# Altium PCB 300W-boost_converter.PcbDoc
Units mm, origin at the board's own origin, x right, y up, seen from the top; angles counter-clockwise.
Board outline 140.59 x 97.66 mm, 2 copper layers (Top Layer, Bottom Layer); 54 components, 25 nets, 129 pads, 2 vias.
Unrouted connection lines stored in the file: 1.
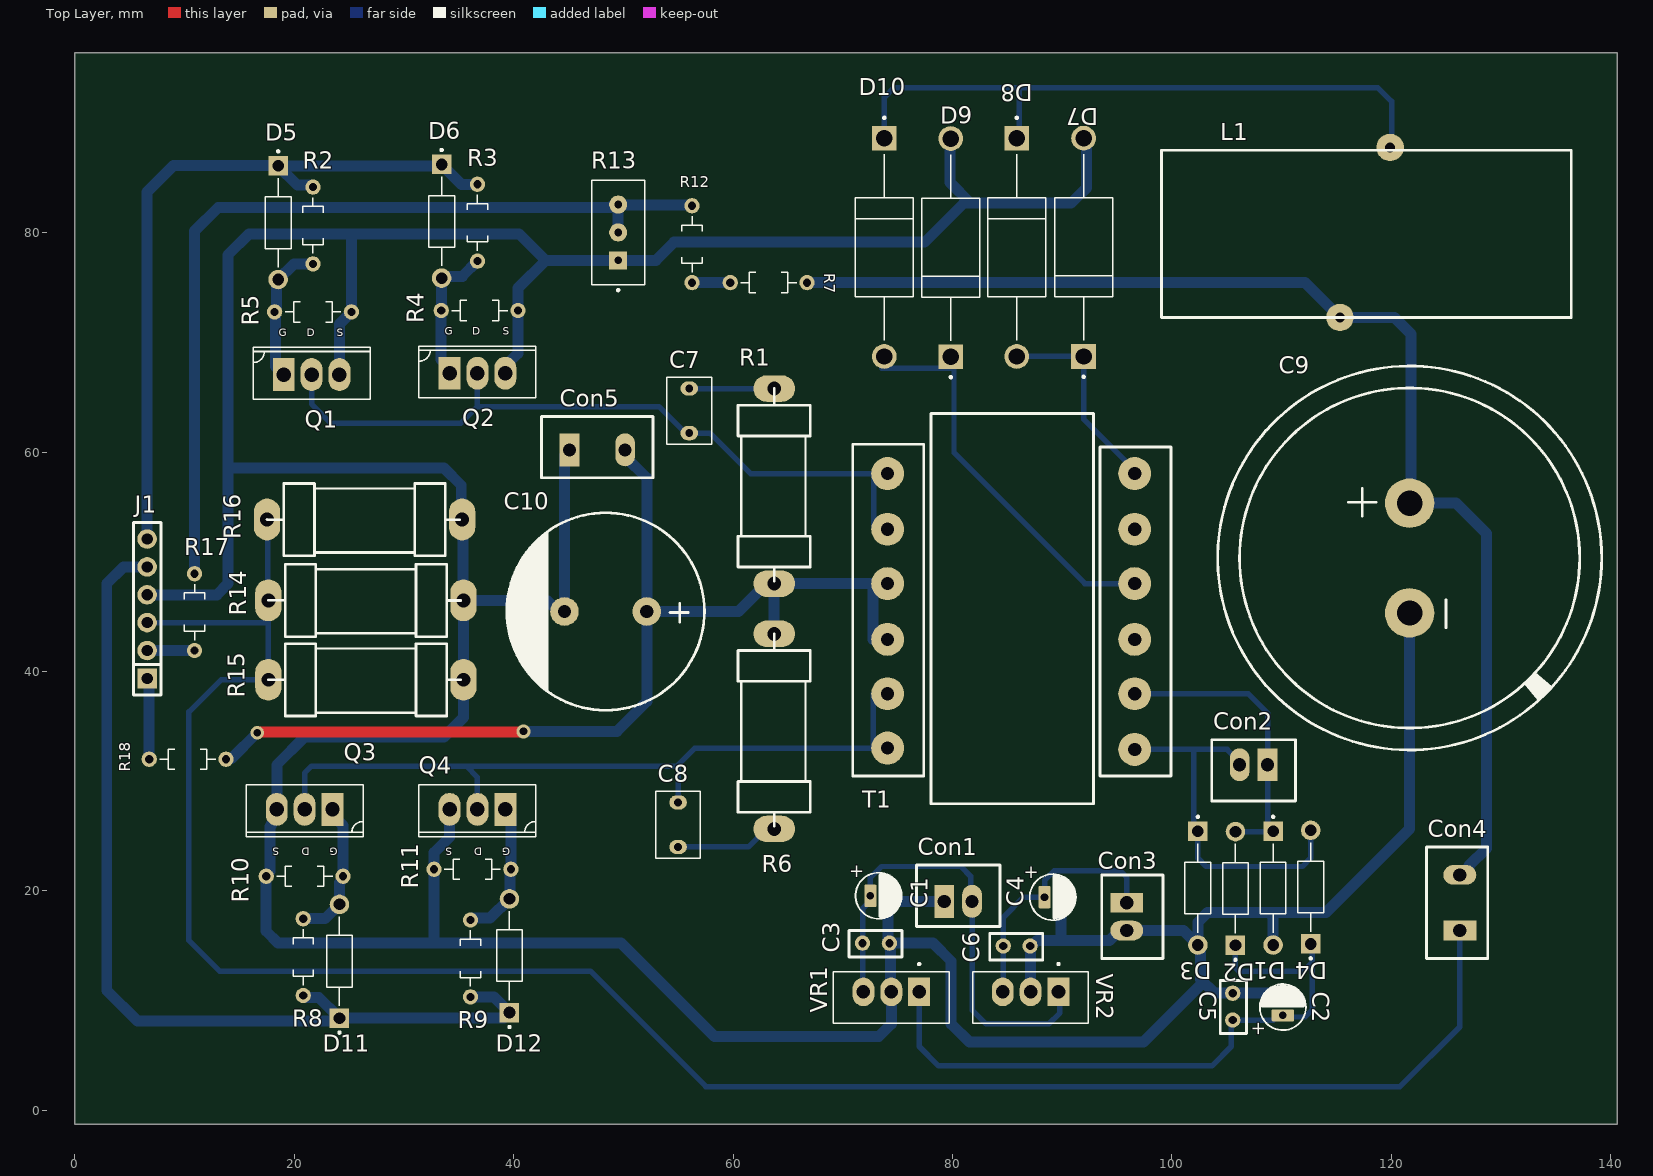
[diagram p0: Top Layer view]
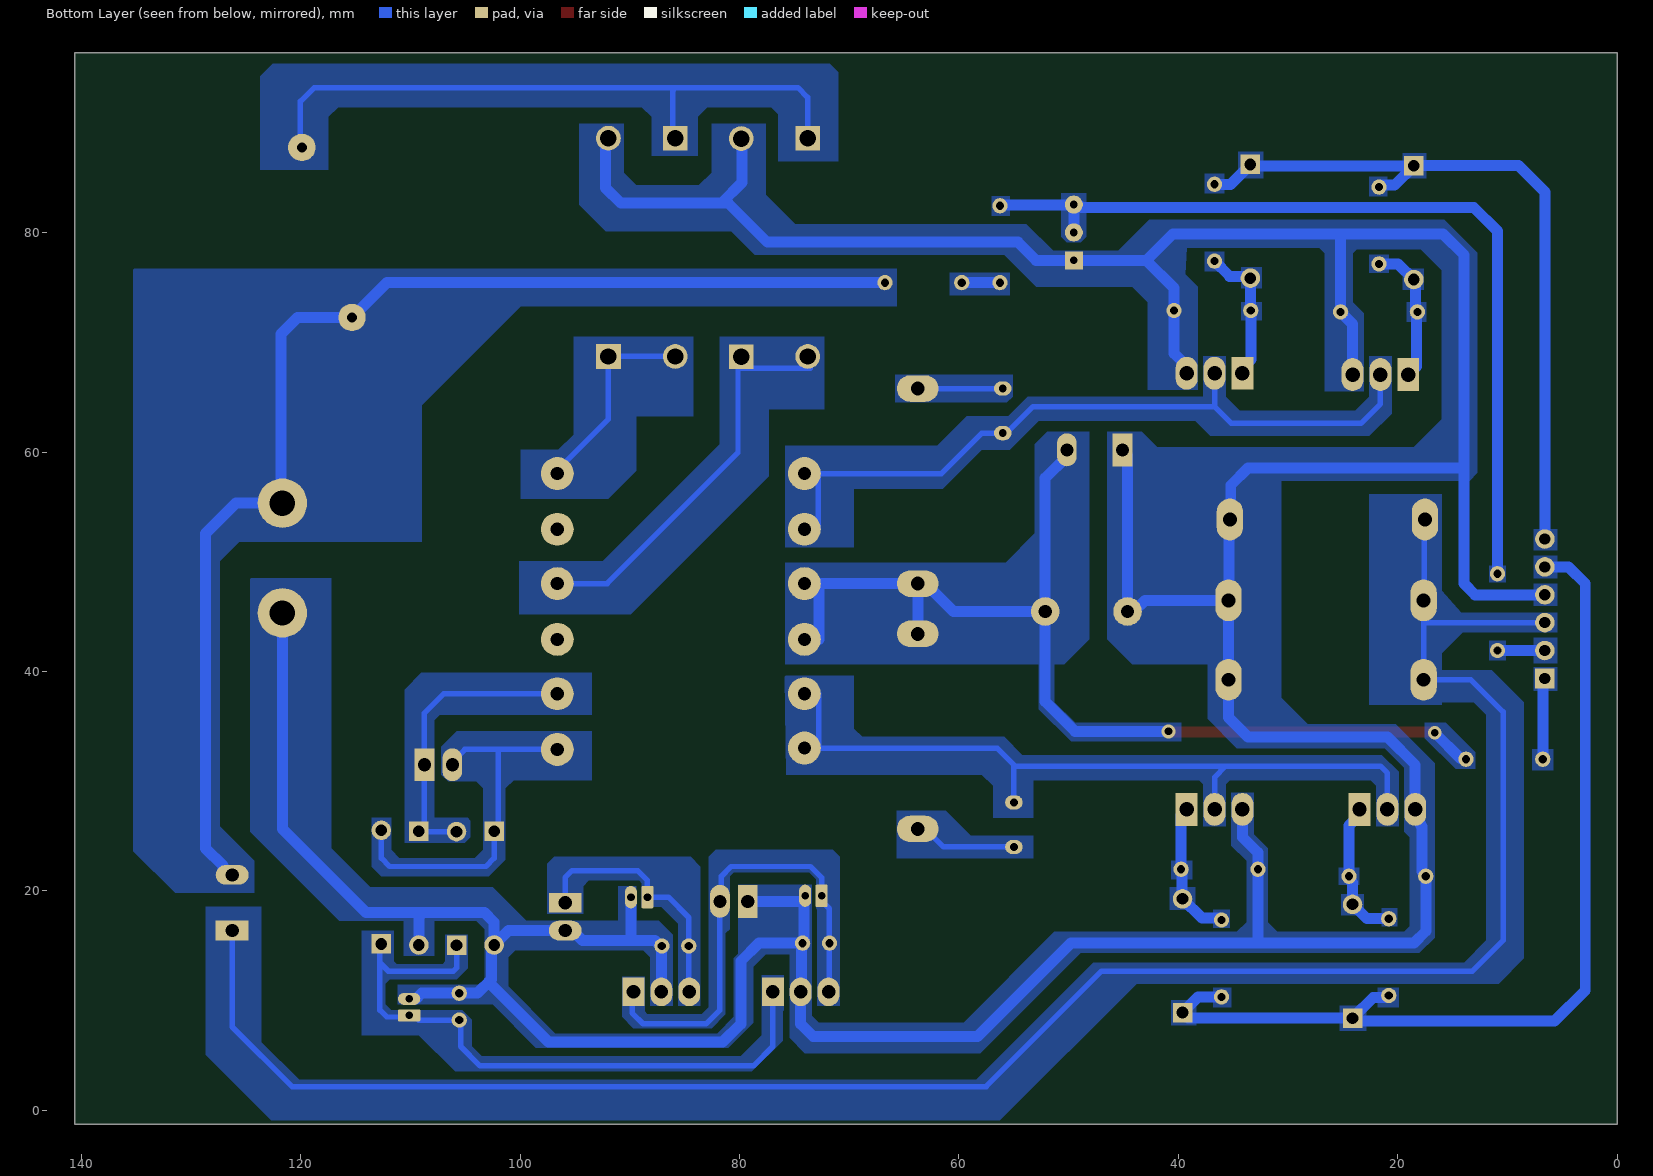
[diagram p1: Bottom Layer view, seen from below]
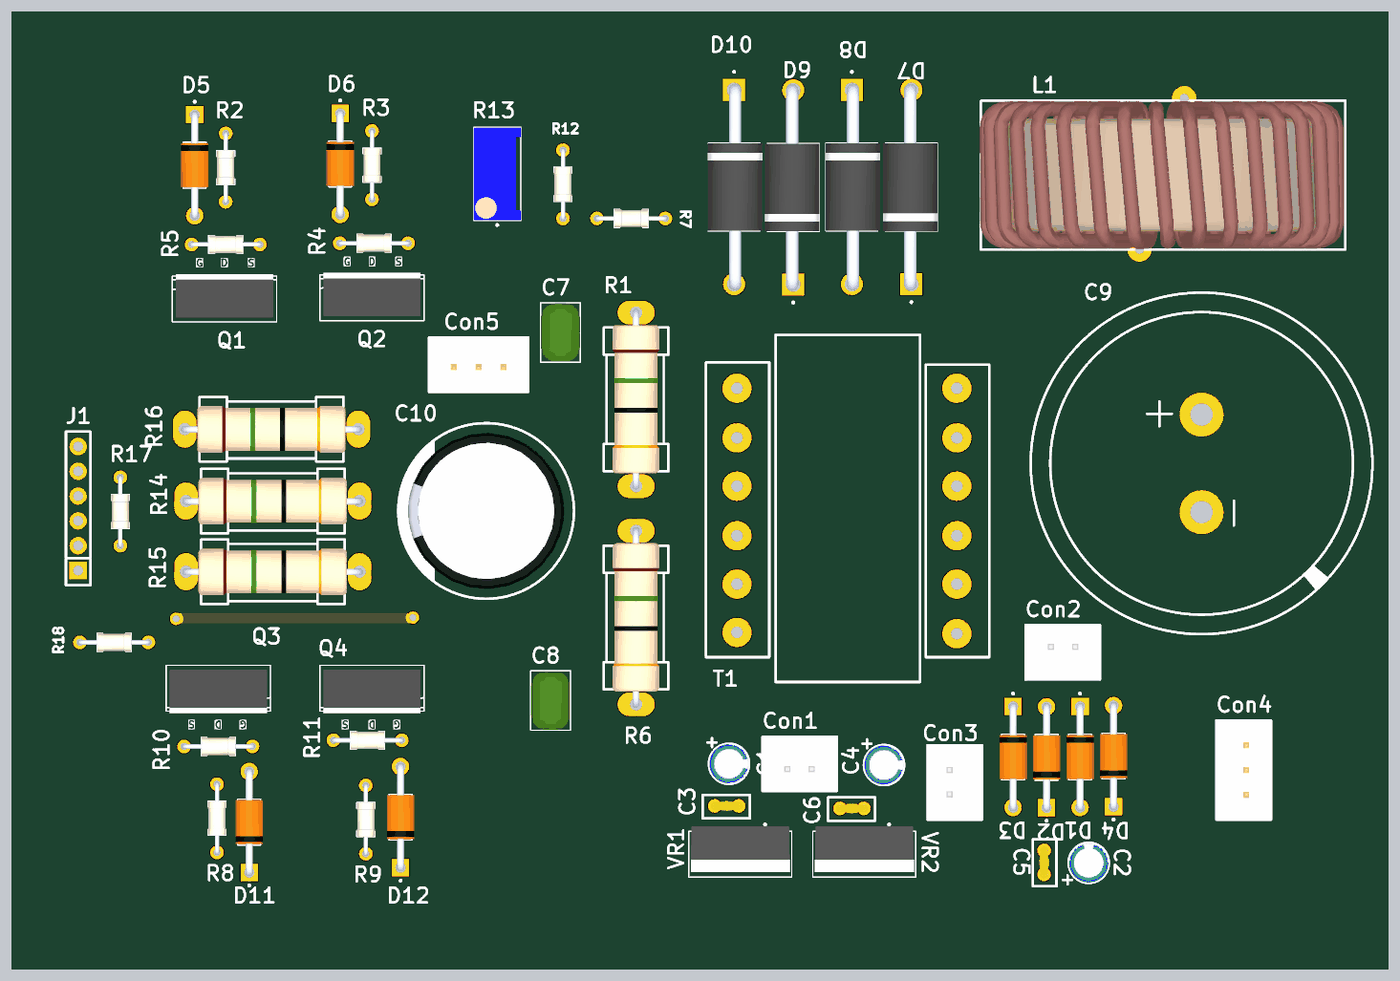
[diagram p2: 3D render of the assembled board from above, using the file's embedded part models]

## Layer stack, top to bottom
Top Solder: solder mask 0.0102, Solder Resist, Dk 3.5
Top Layer: signal copper 0.0356
Dielectric 1: dielectric 0.32, FR-4, Dk 4.8
Bottom Layer: signal copper 0.0356
Bottom Solder: solder mask 0.0102, Solder Resist, Dk 3.5

## Board outline
0,-1.27 140.589,-1.27 140.589,96.393 0,96.393

## Design rules (kind name [scope] priority, off if disabled: settings)
Clearance [All] p1: gap=0.254 ignorepadtopadclearanceinfootprint=FALSE except(0: Arc-Hole Track-Hole SMDPad-Hole THPad-Hole Via-Hole Fill-Hole Poly-Hole Region-Hole Text-Hole)
Height [InComponent('No Component')] p1: minheight=0 maxheight=25.4 prefheight=12.7
PolygonConnect [All] p1: connectstyle=Direct reliefconductorwidth=0.254 reliefentries=4 polygonreliefangle="90 Angle" airgapwidth=0.254
RoutingVias [All] p1: holewidth=0.711 width=1.27 viastyle="Through Hole" minholewidth=0.711 minwidth=1.27 maxholewidth=0.711 maxwidth=1.27
SolderMaskExpansion [All] p1: expansion=0.102 istentingtop=FALSE
Width [All] p1: maxlimit=1 minlimit=0.254 preferedwidth=0.5 minimp=50.000000 maximp=50.000000 favimp=50.000000
29 further rules are at their usual default settings.

## Classes and differential pairs
component class DC_power: C1 C2 C3 C4 C5 C6 Con1 Con2 Con3 D1 D2 D3 D4 VR1 VR2
component class "300W Converter_main_HV": C7 C8 C9 C10 Con4 Con5 D5 D6 D7 D8 D9 D10 D11 D12 J1 L1 Q1 Q2 Q3 Q4 R1 R2 R3 R4 R5 R6 R7 R8 R9 R10 R11 R12 R13 R14 R15 R16 R17 R18 R20 T1

## Components (designator, comment, footprint, x,y, rotation, side; value= is the part's Value field where it differs from the comment)
C1 "100UF25V" "CAP LS-1.5mm D4 H5" 72.517,19.558 r0 top
C2 "470UF25V" "CAP LS-1.5mm D4 H5" 110.109,8.66 r90 top
C3 "1UFCER" CAP-CER-2.54 73.025,15.24 r180 top
C4 "100UF25V" "CAP LS-1.5mm D4 H5" 88.392,19.431 r0 top
C5 "1UFCER" CAP-CER-2.54 105.537,9.455 r270 top
C6 "1UFCER" CAP-CER-2.54 85.852,14.986 r180 top
C7 "0.1uF" CAP-P_Pilm 56.007,63.754 r270 top
C8 "0.1uF" CAP-P_Pilm 54.991,26.035 r270 top
C9 "1000UF400V" CAP-TH_BD35.0-P10.00-D2.3-FD 121.666,50.339 r270 top
C10 "4700UF 35V" CAP-TH_BD18.0-P7.50-D1.2-FD 48.387,45.466 r180 top
Con1 "2pos" 2POS 79.248,19.05 r0 top
Con2 "2pos" 2POS 108.712,31.496 r180 top
Con3 "2pos" 2POS 95.885,18.923 r270 top
Con4 "2pos-3" "2POS - 3" 126.238,18.923 r90 top
Con5 "2pos" "2POS - 3" 47.625,60.198 r0 top
D1 "FR107" DIOAD1036W78L470D235 109.22,20.251 r270 top
D2 "FR107" DIOAD1036W78L470D235 105.791,20.22 r90 top
D3 "FR107" DIOAD1036W78L470D235 102.362,20.251 r270 top
D4 "FR107" DIOAD1036W78L470D235 112.649,20.347 r90 top
D5 "FR107" DIOAD1036W78L470D235 18.542,80.899 r270 top
D6 "FR107" DIOAD1036W78L470D235 33.441,81.026 r270 top
D7 "FR307" DO-27_BD5.3-L8.4-P12.40-D1.3-RD 92.007,78.266 r90 top
D8 "FR307" DO-27_BD5.3-L8.4-P12.40-D1.3-RD 85.793,79.048 r270 top
D9 "FR307" DO-27_BD5.3-L8.4-P12.40-D1.3-RD 79.906,78.231 r90 top
D10 "FR307" DO-27_BD5.3-L8.4-P12.40-D1.3-RD 73.728,79.048 r270 top
D11 "FR107" DIOAD1036W78L470D235 24.13,13.589 r90 top
D12 "FR107" DIOAD1036W78L470D235 39.624,14.097 r90 top
J1 "HDR6Pin" "HDR-TH_6P-P2.54-V-F - duplicate" 6.604,45.72 r90 top
L1 "Troidal core  220uH" "TOROIDAL CORE INDUCTOR" 117.602,79.883 r180 top
Q1 "IRF3205" TO-220 21.59,67.056 r0 top
Q2 "IRF3205" TO-220 36.703,67.183 r0 top
Q3 "IRF3205" TO-220 20.955,27.432 r180 top
Q4 "IRF3205" TO-220 36.703,27.432 r180 top
R1 "RES-0.5W-27R" "RES_TH 3W" 63.754,57.912 r90 top
R2 "10R" RES-TH-7mm 21.717,80.645 r270 top
R3 "10R" RES-TH-7mm 36.703,80.899 r270 top
R4 "10K" RES-TH-7mm 36.901,72.898 r0 top
R5 "10K" RES-TH-7mm 21.717,72.771 r0 top
R6 "RES-0.5W-27R" "RES_TH 3W" 63.754,35.56 r90 top
R7 "470K" RES-TH-7mm 63.246,75.438 r0 top
R8 "10R" RES-TH-7mm 20.828,13.97 r90 top
R9 "10R" RES-TH-7mm 36.068,13.843 r90 top
R10 "10K" RES-TH-7mm 20.955,21.336 r180 top
R11 "10K" RES-TH-7mm 36.251,21.971 r180 top
R12 "2.2K" RES-TH-7mm 56.261,78.938 r270 top
R13 "10K" TRIM_3296W-1-250 49.53,80.01 r90 top
R14 "RES-2W-1R" "RES_TH 3W" 25.527,46.482 r180 top
R15 "RES-2W-1R" "RES_TH 3W" 25.527,39.243 r180 top
R16 "RES-2W-1R" "RES_TH 3W" 25.4,53.848 r180 top
R17 "0R" RES-TH-7mm 10.922,45.41 r270 top
R18 "0R" RES-TH-7mm 10.287,32.004 r0 top
T1 "current transformer" EE35-FP16 85.344,45.466 r0 top
VR1 "LM7812CT" TO254P1054X470X1955-3 74.422,10.795 r180 top
VR2 "LM7805CT" TO254P1054X470X1955-3 87.122,10.795 r180 top

## Footprints (in the part's own frame and the unit in brackets; to place one, negate y for a bottom-side part, rotate by r counter-clockwise, add the part's x,y. Pads: shape width x height; smd on the part's side, far side on the other; paste and mask are expansions set on the pad)
2POS [mm]
  rect 1.8x3 hole 1.2: 1(0,0)
  oval 1.8x3 hole 1.2: 2(2.54,0)
  silkscreen extent -2.54,-2.29 5.08,3.3, body extent -2.47,-2.32 4.96,3.41, height 6.69
"2POS - 3" [mm]
  rect 1.8x3 hole 1.2: 1(-2.54,0)
  oval 1.8x3 hole 1.2: 2(2.54,0)
  silkscreen extent -5.08,-2.54 5.08,3.05, body extent -5.04,-2.54 5.04,3.16, height 7.01
"CAP LS-1.5mm D4 H5" [mm]
  rrect20% 1.1x2.032 hole 0.7: 1(0,0)
  oval 1.1x2.032 hole 0.7: 2(1.5,0)
  silkscreen extent -1.35,-2.1 2.85,2.1, body extent -1.25,-2 2.74,2, height 5
CAP-CER-2.54 [mm]
  round 1.397 hole 0.75: 1(-1.225,0) 2(1.225,0)
  silkscreen extent -2.37,-1.14 2.46,1.27, body extent -1.62,-0.5 1.62,0.5, height 4.99
CAP-P_Pilm [mm]
  oval 1.3x1.6 hole 0.71: 1(-2.032,0) 2(2.032,0)
  silkscreen extent -3.05,-2.03 3.05,2.03, body extent -3,-2 3,2, height 12.5
CAP-TH_BD18.0-P7.50-D1.2-FD [mm]
  round 2.6 hole 1.2 paste+0 mask+0.051: 1(-3.75,0.001) 2(3.75,0.001)
  silkscreen extent -9,-9 9,9, body extent -8,-8 8,8, height 35
CAP-TH_BD35.0-P10.00-D2.3-FD [mm]
  round 4.5 hole 2.3 paste+0 mask+0.051: 1(-5,0) 2(5,0)
  silkscreen extent -17.5,-17.5 17.5,17.5, body extent -15,-15 15,15, height 34.94
DIOAD1036W78L470D235 [mm]
  rect 1.778x1.778 hole 1.06: 1(-5.18,0)
  round 1.778 hole 1.06: 2(5.18,0)
  silkscreen extent -6.6,-1.17 4.07,1.17, body extent -5.55,-1.4 5.55,1.4, height 2.8
DO-27_BD5.3-L8.4-P12.40-D1.3-RD [mm]
  round 2.25 hole 1.5 mask+0.102: A(10.341,0.059)
  rect 2.25x2.25 hole 1.5 mask+0.102: C(-9.559,0.059)
  silkscreen extent -11.51,-2.59 8.86,2.71, body extent -10.19,-2.62 10.96,2.96, height 5.6
EE35-FP16 [mm]
  round 3 hole 1.2 paste+0.102 mask+0.102: 1(-11.26,7.493) 1(-11.26,12.573) 2(-11.26,-2.54) 2(-11.26,2.54) 3(-11.26,-12.446) 3(-11.26,-7.493) 4(11.26,-12.573) 5(11.26,-7.493) 6(11.26,2.54) 7(11.26,12.573) ""(11.26,-2.54) ""(11.26,7.493)
  silkscreen extent -14.43,-17.53 14.57,18.03
"HDR-TH_6P-P2.54-V-F - duplicate" [mil]
  rect 70.87x70.87 hole 40.16 paste+0 mask+2: 1(-250,0)
  round 70 hole 40.16 paste+0 mask+2: 2(-150,0) 3(-50,0) 4(50,0) 5(150,0) 6(250,0)
  silkscreen extent -310,-49 310,49
RES-TH-7mm [mm]
  round 1.397 hole 0.75: 1(-3.5,0) 2(3.5,0)
  silkscreen extent -2.55,-0.92 2.55,0.92, body extent -3.72,-0.92 3.72,0.92, height 1.84
"RES_TH 3W" [mil] "Res_TH 3W"
  oval 95x150 hole 50: 1(-390,0) 2(310,0)
  silkscreen extent -380,-130 310,130, body extent -403,-93 325,95, height 225
TO254P1054X470X1955-3 [mm]
  rect 2x2.6 hole 1.24: 1(-2.54,0)
  oval 2x2.6 hole 1.24: 2(0,0) 3(2.54,0)
  silkscreen extent -5.27,-2.64 5.27,2.86, body extent -5.08,-2.35 5.08,2.35, height 15.49
TO-220 [mm] "TO-220"
  rect 2x3 hole 1.32: 1(-2.54,0)
  oval 2x3 hole 1.32: 2(0,0) 3(2.54,0)
  silkscreen extent -5.34,-2.22 5.34,2.47, body extent -4.98,-1.76 4.98,2.69, height 19.68
"TOROIDAL CORE INDUCTOR" [mil]
  round 98.42 hole 36 paste+0 mask+2: 1(90,300) 2(-90,-310)
  silkscreen extent -740,-300 730,300, body extent -735,-297 735,297, height 1837
TRIM_3296W-1-250 [mil]
  rect 65x65 hole 27.95: 1(-100,0)
  round 65 hole 27.95: 2(0,0) 3(100,0)
  silkscreen extent -211,-95 188,95, body extent -188,-95 188,95, height 455

## Part data
C1 C4: "CAP TH AL: 100U 25V", LCSC Part #=C43351, Unit Price=0.0057
C2: "CAP TH AL: 470U 25V", LCSC Part #=C43351, Unit Price=0.0057
C3 C5 C6: "CAP: CER 1UF 50V", LCSC Part #=C1848, Unit Price=0.0104
C7 C8: library part 0.1uF_film, "Cap Ceramic 0.1uF 100V X7R 10% Radial 2.54mm 125Â°C T/R", Package=None, Check_prices=https://www.snapeda.com/parts/SR201C104KARTR1/Kyocera/view-part/?ref=eda, MF="KYOCERA AVX", MP=SR201C104KARTR1, SnapEDA_Link=https://www.snapeda.com/parts/SR201C104KARTR1/Kyocera/view-part/?ref=snap
C9: "CAP TH AL: 1000U 400V", LCSC Part #=C43351, Unit Price=0.0057
C10: "CAP TH AL: 4700UF 35V", LCSC Part #=C43351, Unit Price=0.0057
Con1 Con2 Con3 Con4 Con5: "P2.54mm"
D1 D2 D3 D4 D5 D6 D11 D12: "DIODE: GEN 1A 1.0V@1A 1kV DO-41 TH", LCSC Part #=C36138, Unit Price=0.0313
D7 D8 D9 D10: "DIODE: 500ns, 3A, 1000V, Fast Recovery RectifierDO-201AD TH", LCSC Part #=C36138, Unit Price=0.0313
J1: library part HDR6Pin_1, "HEADER: 1*6P FEMale"
L1: library part Inductor, "Troidal core  inductor: 220uH"
Q1 Q2 Q3 Q4: "MOSFET: N-CH 55V 110A TO-220", LCSC Part #=C274639, Unit Price=0.2595
R1 R6: "RES: 27 OHM 1% 0.5W TH"
R2 R3 R8 R9: "RES TH: 10R"
R4 R5 R10 R11: "RES TH: 10K"
R7: "RES TH: 470K"
R12: "RES TH: 2.2K"
R13: library part "10K POT", "RES TH: 10K POT"
R14 R15 R16: "RES: 1 OHM 1% 2W TH"
R17 R18: "RES TH: JUMPER"
T1: library part "EE42 transformer", "ferrite core transformer EE42"
VR1: "1.5-A, 12-V, linear voltage regulator", Package="TO-220-3 Texas Instruments", Check_prices=https://www.snapeda.com/parts/LM7812CT/NOPB/Texas+Instruments/view-part/?ref=eda, MF="Texas Instruments", MP=LM7812CT/NOPB, SnapEDA_Link=https://www.snapeda.com/parts/LM7812CT/NOPB/Texas+Instruments/view-part/?ref=snap
VR2: "1.5-A,  5-V, linear voltage regulator", Package="TO-220-3 Texas Instruments", Check_prices=https://www.snapeda.com/parts/LM7812CT/NOPB/Texas+Instruments/view-part/?ref=eda, MF="Texas Instruments", MP=LM7812CT/NOPB, SnapEDA_Link=https://www.snapeda.com/parts/LM7812CT/NOPB/Texas+Instruments/view-part/?ref=snap

## Via types
v1: diameter 1.27, hole 0.711, Top Layer to Bottom Layer, 2 vias

## Nets (pads, with @x,y where several pads share a name; then routed paths per layer and width w, separated by ;. In a path a pad name is that pad's centre, name@x,y a point inside that pad or via, vN(x,y) a via of type N, cw(c..) or ccw(c..) an arc to the next point about the centre after c; other vN are vias at no path point)
400V: C9.1 Con4.2 L1.1 R7.2 | length 112.8
  Bottom Layer w1: R7.2 112.141,75.438 L1.1 120.269,72.263 121.793,70.739 121.793,55.466 C9.1 125.89,55.339 128.651,52.578 128.651,23.876 127.087,22.312 127.087,22.064 126.486,21.463 Con4.2
+5: C4.1 C6.2 Con3.1 VR2.3 | length 23.3
  Bottom Layer w0.5: VR2.3 84.604,10.817 84.604,14.964 C6.2 84.627,17.571 86.487,19.431 C4.1 88.392,20.955 89.281,21.844 95.25,21.844 95.885,21.209 Con3.1
+12: C1.1 C3.2 Con1.2 VR1.3 VR2.1 | length 43.8
  Bottom Layer w0.5: VR1.3 71.841,10.836 71.841,15.199 C3.2 71.8,18.375 72.517,19.092 72.517,21.209 73.533,22.225 80.772,22.225 81.661,21.336 81.661,19.177 Con1.2 81.788,9.144 83.058,7.874 88.773,7.874 89.789,8.89 89.789,10.668 VR2.1
+18VAC: Con2.1 D1.1 D2.2 T1.5 | length 26.1
  Bottom Layer w0.5: T1.5@97.79,37.973 106.934,37.973 108.712,36.195 Con2.1 108.712,25.939 D1.1 109.189,25.4 D2.2
-18VAC: Con2.2 D3.1 D4.2 T1.4 | length 32.6
  Bottom Layer w0.5: T1.4@97.79,32.893 101.981,32.893 ; Con2.2 106.172,31.744 105.023,32.893 101.981,32.893 ; D4.2 112.649,22.987 111.887,22.225 103.124,22.225 102.362,22.987 D3.1 101.981,25.812 101.981,32.893
D1: C7.2 Q1.2 Q2.2 T1.1 | length 65.9
  Bottom Layer w0.5: Q1.2 21.59,64.389 23.368,62.611 35.179,62.611 36.703,64.135 ; Q2.2 36.703,64.135 ; T1.1@72.898,52.959 72.834,53.023 72.834,57.975 72.771,58.039 61.595,58.039 57.912,61.722 C7.2 55.655,61.722 53.242,64.135 36.703,64.135
D2: C8.1 Q3.2 Q4.2 T1.3 | length 68.8
  Bottom Layer w0.5: Q3.2 20.955,30.734 21.59,31.369 35.687,31.369 ; Q4.2 36.703,30.353 35.687,31.369 ; C8.1 54.991,31.496 ; T1.3@72.771,37.973 72.771,33.02 56.515,33.02 54.991,31.496 ; 35.687,31.369 54.864,31.369 54.991,31.496
GND: C1.2 C2.2 C3.1 C4.2 C5.1 C6.1 C9.2 C10.2 Con1.1 Con3.2 Con5.1 D1.2 D3.2 D7.A D9.A J1.4 Q1.3 Q2.3 Q3.3 Q4.3 R4.2 R5.2 R10.2 R11.2 R13.1 R14.1 R15.1 R16.1 VR1.2 VR2.2 | length 470.8
  Bottom Layer w1: J1.4 12.954,46.99 13.97,48.006 13.97,58.547 ; Q1.3 24.13,71.684 R5.2 25.217,79.573 25.527,79.883 ; Q4.3 34.163,24.892 32.751,23.48 R11.2 32.751,15.24 ; Q2.3 39.243,67.842 40.401,69 R4.2 40.401,74.945 42.926,77.47 ; Con5.1 44.637,59.75 C10.2 44.069,45.465 43.052,46.482 R14.1 ; C1.2 74.017,19.327 C1.2@74.132,19.212 ; Con1.1 74.294,19.05 C1.2@74.132,19.212 ; D9.A@79.756,87.79 79.756,84.582 81.661,82.677 ; VR2.2 87.099,10.818 87.099,14.964 C6.1 87.184,14.986 87.692,15.494 90.17,15.494 ; 89.892,15.594 C4.2 ; 90.27,15.494 94.299,15.494 94.975,16.17 95.672,16.17 Con3.2 101.05,16.383 D3.2 ; D7.A@92.202,88.449 92.202,84.074 90.805,82.677 81.661,82.677 ; 102.87,11.684 97.409,6.223 81.534,6.223 79.883,7.874 79.883,13.589 78.232,15.24 C3.1 ; D1.2 109.22,17.653 108.839,18.034 ; C2.2 109.481,10.16 108.961,10.68 C5.1 103.874,10.68 102.607,11.947 102.607,14.826 D3.2 ; C9.2 121.666,25.654 114.046,18.034 108.839,18.034 ; 13.97,58.547 33.655,58.547 35.23,56.972 35.23,53.924 R16.1 35.369,53.785 35.369,46.545 R14.1 ; 13.97,58.547 13.97,77.978 15.875,79.883 25.527,79.883 ; 25.527,79.883 40.513,79.883 42.926,77.47 ; 32.751,15.24 18.542,15.24 17.455,16.327 R10.2 17.455,21.443 17.78,21.768 17.78,25.891 17.915,26.026 17.915,26.161 18.415,26.661 Q3.3 18.415,31.496 20.955,34.036 33.655,34.036 35.433,35.814 R15.1 R14.1 ; 32.751,15.24 49.784,15.24 58.293,6.731 73.279,6.731 74.422,7.874 VR1.2 74.336,10.881 74.336,15.154 C3.1 ; 42.926,77.47 R13.1 52.959,77.47 54.61,79.121 77.47,79.121 81.026,82.677 81.661,82.677 ; C1.2@74.132,19.212 74.132,15.358 C3.1 ; D3.2 102.362,17.145 103.251,18.034 108.839,18.034
I_SENSE: Con4.1 J1.3 R14.2 R15.2 R16.2 | length 187.4
  Bottom Layer w0.5: J1.3 17.653,44.45 ; R16.2 17.59,53.785 17.59,46.545 R14.2 17.653,44.45 ; Con4.1 126.238,7.62 120.777,2.159 57.531,2.159 46.99,12.7 13.208,12.7 10.414,15.494 10.414,36.322 13.335,39.243 R15.2 17.653,44.45
NetC2_1: C2.1 C5.2 D2.1 D4.1 VR1.1 | length 60.9
  Bottom Layer w0.5: VR1.1 76.962,5.842 78.74,4.064 103.632,4.064 105.41,5.842 105.41,8.103 C5.2 109.213,8.23 109.643,8.66 C2.1 110.26,8.509 112.141,8.509 112.776,9.144 112.776,13.462 ; D2.1 105.791,12.993 106.084,12.7 112.014,12.7 112.776,13.462 ; D4.1@112.776,15.521 112.776,13.462
NetC7_1: C7.1 R1.2 | length 7.7
  Bottom Layer w0.5: C7.1 R1.2
NetC8_2: C8.2 R6.1 | length 9.4
  Bottom Layer w0.5: C8.2 61.404,24.003 63.055,25.654 R6.1
NetD5_2: D5.2 Q1.1 R2.2 R5.1 | length 12.9
  Bottom Layer w1: Q1.1 18.3,67.806 18.3,72.688 R5.1 18.38,72.934 18.38,75.557 D5.2 19.968,77.145 R2.2
NetD6_2: D6.2 Q2.1 R3.2 R4.1 | length 12.9
  Bottom Layer w1: Q2.1 34.163,67.683 33.401,68.445 R4.1 33.421,72.918 33.421,75.826 D6.2 33.613,76.018 35.322,76.018 R3.2
NetD7_C: D7.C D8.A T1.7 | length 19
  Bottom Layer w0.5: D8.A@86.612,68.707 D7.C 91.948,62.992 96.318,58.622 96.404,58.622 97.114,57.912 T1.7@97.79,57.912
NetD8_C: D8.C D10.C L1.2 | length 59.9
  Bottom Layer w0.5: D10.C 73.787,92.329 74.676,93.218 85.813,93.218 ; D8.C 86.106,88.861 86.106,92.925 85.813,93.218 ; L1.2 120.015,87.884 120.015,91.948 118.745,93.218 85.813,93.218
NetD9_C: D9.C D10.A T1.6 | length 36.9
  Bottom Layer w0.5: D10.A@73.556,67.621 79.94,67.621 80.01,67.691 80.137,67.564 80.137,59.944 92.075,48.006 T1.6@97.79,48.006
NetD11_2: D11.2 Q3.1 R8.2 R10.1 | length 13
  Bottom Layer w1: R8.2 22.831,17.47 D11.2 24.13,20.768 24.455,21.093 R10.1 24.455,25.972 23.495,26.932 Q3.1
NetD12_2: D12.2 Q4.1 R9.2 R11.1 | length 12.8
  Bottom Layer w1: R9.2 36.24,17.515 37.862,17.515 D12.2 39.688,19.34 39.688,21.907 R11.1 39.751,26.924 Q4.1
NetJ1_1: J1.1 R18.1 | length 7.4
  Bottom Layer w1: J1.1 6.787,39.187 R18.1
NetR7_1: R7.1 R12.2 | length 3.5
  Bottom Layer w1: R12.2 R7.1
PULSE_A_G: D5.1 D6.1 J1.6 R2.1 R3.1 | length 66.8
  Bottom Layer w1: J1.6 6.604,83.693 9.017,86.106 18.515,86.106 D5.1 ; R2.1 21.545,84.317 20.304,84.317 D5.1 ; D6.1@32.806,86.079 D5.1 ; D6.1 35.248,84.399 R3.1
PULSE_B_G: D11.1 D12.1 J1.5 R8.1 R9.1 | length 87.7
  Bottom Layer w1: J1.5 4.445,49.53 2.921,48.006 2.921,10.922 5.715,8.128 23.849,8.128 D11.1 39.116,8.409 D12.1 38.198,10.343 R9.1 ; R8.1 21,10.298 22.241,10.298 D11.1@24.03,8.509
V_FB: J1.2 R12.1 R13.2 R13.3 R17.1 R17.2 | length 84.5
  Bottom Layer w1: J1.2 R17.2 ; R17.1 10.922,80.137 13.081,82.296 48.816,82.296 48.945,82.425 49.405,82.425 R13.3 ; R13.2 R13.3 ; R12.1 56.205,82.494 49.586,82.494 R13.3
VBATT: C10.1 Con5.2 R1.1 R6.2 R18.2 T1.2 | length 95.6
  Top Layer w0.5: v1(16.637,34.417) v1@16.7,34.48 ; v1@40.831,34.48 v1(40.894,34.544)
  Top Layer w1: v1@16.7,34.48 v1@40.831,34.48
  Bottom Layer w1: R18.2 13.863,32.08 14.3,32.08 v1(16.637,34.417) ; v1(40.894,34.544) 49.403,34.544 52.137,37.278 C10.1 ; Con5.2 50.165,59.598 52.137,57.626 C10.1 ; R6.2 R1.1 ; T1.2@72.771,42.926 72.771,48.006 R1.1 ; C10.1 60.515,45.465 63.055,48.006 R1.1
pads on no net: T1.

## Polygon pours and split planes (outlines as drawn)
GND on Bottom Layer "GND_L02_P005" (solid, pour order 5): 12.764,58.102 13.462,57.404 34.544,57.404 34.544,60.452 18.542,60.452 16.002,62.992 16.002,76.581 17.907,78.486 23.749,78.486 24.13,78.105 24.13,73.66 23.114,72.644 23.114,65.532 26.67,65.532 26.67,78.105 27.178,78.613 39.255,78.613 39.37,76.2 38.227,75.057 38.227,65.659 42.799,65.659 42.799,73.66 44.196,75.057 51.562,75.057 51.562,78.359 45.466,78.359 42.672,81.153 15.748,81.153 12.764,78.169
D2 on Bottom Layer "D2_L02_P008" (solid, pour order 8): 19.939,25.908 21.971,25.908 21.971,29.591 22.479,30.099 35.306,30.099 35.687,29.718 35.687,25.908 37.719,25.908 37.719,29.718 38.1,30.099 53.213,30.099 53.213,26.67 56.896,26.67 56.896,29.591 57.912,30.607 75.753,30.607 75.891,39.621 74.419,39.621 69.596,39.621 69.596,34.798 68.834,34.036 55.88,34.036 54.229,32.385 21.463,32.385 19.939,30.861
NetD11_2 on Bottom Layer "NETD11_2_L02_P047" (solid, pour order 47): 20.066,18.415 20.066,16.764 21.463,16.764 21.463,18.415
NetD6_2 on Bottom Layer "NETD6_2_L02_P059" (solid, pour order 59): 35.814,78.232 37.592,78.232 37.592,76.454 35.814,76.454
NetD6_2 on Bottom Layer "NETD6_2_L02_P058" (solid, pour order 58): 32.385,76.835 34.29,76.835 34.29,74.93 32.385,74.93
NetD6_2 on Bottom Layer "NETD6_2_L02_P057" (solid, pour order 57): 32.385,73.66 34.29,73.66 34.29,72.009 32.385,72.009
PULSE_B_G on Bottom Layer "PULSE_B_G_L02_P056" (solid, pour order 56): 35.179,11.176 36.83,11.176 36.83,9.398 35.179,9.398
PULSE_B_G on Bottom Layer "PULSE_B_G_L02_P055" (solid, pour order 55): 40.64,7.747 40.64,10.033 38.354,10.033 38.354,7.747
PULSE_B_G on Bottom Layer "PULSE_B_G_L02_P054" (solid, pour order 54): 25.273,7.239 25.273,9.525 22.86,9.525 22.86,7.239
PULSE_B_G on Bottom Layer "PULSE_B_G_L02_P053" (solid, pour order 53): 19.939,11.176 21.844,11.176 21.844,9.398 19.939,9.398
NetD12_2 on Bottom Layer "NETD12_2_L02_P052" (solid, pour order 52): 38.735,22.733 40.64,22.733 40.64,21.082 38.735,21.082
NetD12_2 on Bottom Layer "NETD12_2_L02_P051" (solid, pour order 51): 38.481,20.32 40.767,20.32 40.767,18.288 38.481,18.288
NetD12_2 on Bottom Layer "NETD12_2_L02_P050" (solid, pour order 50): 35.306,18.288 35.306,16.637 36.83,16.637 36.83,18.288
NetD11_2 on Bottom Layer "NETD11_2_L02_P049" (solid, pour order 49): 23.495,22.098 25.4,22.098 25.4,20.574 23.495,20.574
NetD11_2 on Bottom Layer "NETD11_2_L02_P048" (solid, pour order 48): 23.114,19.685 25.146,19.685 25.146,17.78 23.114,17.78
V_FB on Bottom Layer "V_FB_L02_P046" (solid, pour order 46): 55.372,83.312 57.023,83.312 57.023,81.534 55.372,81.534
V_FB on Bottom Layer "V_FB_L02_P045" (solid, pour order 45): 48.387,83.566 50.673,83.566 50.673,79.629 50.165,79.121 48.895,79.121 48.387,79.629
V_FB on Bottom Layer "V_FB_L02_P044" (solid, pour order 44): 10.16,42.799 11.684,42.799 11.684,41.021 10.16,41.021
V_FB on Bottom Layer "V_FB_L02_P043" (solid, pour order 43): 10.16,49.657 11.684,49.657 11.684,48.133 10.16,48.133
NetD5_2 on Bottom Layer "NETD5_2_L02_P042" (solid, pour order 42): 17.399,73.66 19.177,73.66 19.177,71.882 17.399,71.882
NetD5_2 on Bottom Layer "NETD5_2_L02_P041" (solid, pour order 41): 17.653,76.708 19.558,76.708 19.558,74.803 17.653,74.803
NetD5_2 on Bottom Layer "NETD5_2_L02_P040" (solid, pour order 40): 20.843,77.978 22.606,77.978 22.606,76.327 20.843,76.327
PULSE_A_G on Bottom Layer "PULSE_A_G_L02_P039" (solid, pour order 39): 35.814,85.344 37.592,85.344 37.592,83.566 35.814,83.566
PULSE_A_G on Bottom Layer "PULSE_A_G_L02_P038" (solid, pour order 38): 32.258,87.376 34.544,87.376 34.544,84.963 32.258,84.963
PULSE_A_G on Bottom Layer "PULSE_A_G_L02_P037" (solid, pour order 37): 20.955,85.09 22.606,85.09 22.606,83.312 20.955,83.312
PULSE_A_G on Bottom Layer "PULSE_A_G_L02_P036" (solid, pour order 36): 17.399,87.249 19.558,87.249 19.558,84.963 17.399,84.963
NetJ1_1 on Bottom Layer "NETJ1_1_L02_P035" (solid, pour order 35): 5.842,32.893 7.747,32.893 7.747,30.988 5.842,30.988
NetJ1_1 on Bottom Layer "NETJ1_1_L02_P034" (solid, pour order 34): 5.461,40.386 7.62,40.386 7.62,38.227 5.461,38.227
V_FB on Bottom Layer "V_FB_L02_P033" (solid, pour order 33): 5.461,43.053 7.62,43.053 7.62,40.767 5.461,40.767
GND on Bottom Layer "GND_L02_P032" (solid, pour order 32): 5.461,48.006 7.62,48.006 7.62,45.974 5.461,45.974
PULSE_B_G on Bottom Layer "PULSE_B_G_L02_P031" (solid, pour order 31): 5.461,50.546 7.62,50.546 7.62,48.514 5.461,48.514
PULSE_A_G on Bottom Layer "PULSE_A_G_L02_P030" (solid, pour order 30): 5.461,52.959 7.62,52.959 7.62,51.054 5.461,51.054
NetR7_1 on Bottom Layer "NETR7_1_L02_P029" (solid, pour order 29): 55.372,76.327 55.372,74.295 60.833,74.295 60.833,76.327
I_SENSE on Bottom Layer "I_SENSE_L02_P001" (solid, pour order 1): 5.461,45.339 14.199,45.339 16.002,47.343 16.002,56.134 22.606,56.134 22.606,36.957 16.002,36.957 16.002,41.656 14.097,43.561 5.461,43.561
VBATT on Bottom Layer "VBATT_L02_P028" (solid, pour order 28): 12.954,32.639 12.954,31.115 14.732,31.115 17.526,33.909 17.526,35.306 15.621,35.306
VBATT on Bottom Layer "VBATT_L02_P027" (solid, pour order 27): 39.751,33.655 49.784,33.655 52.705,36.576 52.705,41.021 51.308,41.021 51.308,37.211 49.403,35.306 39.751,35.306
I_SENSE on Bottom Layer "I_SENSE_L02_P003" (solid, pour order 3): 13.081,37.211 11.938,36.068 11.938,15.494 13.97,13.462 47.752,13.462 58.42,2.794 120.142,2.794 123.571,6.223 123.571,18.542 128.651,18.542 128.651,5.08 122.682,-0.889 56.261,-0.889 43.815,11.557 10.795,11.557 8.509,13.843 8.509,37.211 11.43,40.132 16.256,40.132 16.256,37.211
NetD8_C on Bottom Layer "NETD8_C_L02_P026" (solid, pour order 26): 70.993,86.487 76.454,86.487 76.454,90.805 77.089,91.44 82.931,91.44 83.82,90.551 83.82,86.995 88.011,86.995 88.011,90.551 88.9,91.44 116.586,91.44 117.475,90.551 117.475,85.725 123.698,85.725 123.698,94.234 122.555,95.377 71.755,95.377 70.993,94.615
GND on Bottom Layer "GND_L02_P025" (solid, pour order 25): 50.667,78.346 51.422,78.346 53.848,80.772 74.93,80.772 77.597,83.439 77.597,89.916 82.55,89.916 82.55,85.471 83.693,84.328 89.408,84.328 90.551,85.471 90.551,89.916 94.615,89.916 94.615,82.55 92.202,80.137 80.772,80.137 78.613,77.978 55.88,77.978 52.959,75.057 50.673,75.057 50.673,78.359
400V on Bottom Layer "400V_L02_P023" (solid, pour order 23): 65.659,76.697 65.659,73.279 99.949,73.279 108.966,64.262 108.966,51.816 125.603,51.816 127.381,50.038 127.381,25.908 124.206,22.733 124.206,19.812 131.445,19.812 135.256,23.623 135.254,76.72
GND on Bottom Layer "GND_L02_P022" (solid, pour order 22): 89.408,17.018 91.059,17.018 91.059,20.447 89.408,20.447 89.408,19.939
GND on Bottom Layer "GND_L02_P021" (solid, pour order 21): 86.106,9.525 86.106,16.002 87.376,17.272 99.441,17.272 102.489,20.32 113.665,20.32 117.221,23.876 117.221,48.514 124.714,48.514 124.587,48.387 124.587,25.4 116.459,17.272 110.617,17.272 110.617,14.097 107.823,14.097 107.823,17.272 104.013,17.272 103.24,16.499 103.24,11.314 101.103,11.314 101.092,11.303 101.092,13.97 100.457,14.605 88.773,14.605 88.138,13.97 88.138,13.716 88.138,9.525
GND on Bottom Layer "GND_L02_P019" (solid, pour order 19): 73.406,20.574 80.137,20.574 80.137,14.207 73.406,14.207
+5 on Bottom Layer "+5_L02_P018" (solid, pour order 18): 83.566,9.525 83.566,22.225 84.455,23.114 96.901,23.114 97.536,22.479 97.536,17.907 94.234,17.907 94.234,20.447 93.726,20.955 89.154,20.955 88.9,20.701 88.9,18.542 87.122,18.542 85.598,17.018 85.598,9.525
GND on Bottom Layer "GND_L02_P017" (solid, pour order 17): 75.184,15.748 78.613,15.748 80.518,13.843 80.518,8.509 82.042,6.985 96.774,6.985 101.219,11.43 111.125,11.43 111.125,9.652 102.489,9.652 98.552,5.715 81.026,5.715 78.74,8.001 78.74,13.081 77.597,14.224 75.184,14.224
+12 on Bottom Layer "+12_L02_P016" (solid, pour order 16): 72.898,18.288 73.025,18.415 73.025,21.082 73.66,21.717 80.518,21.717 80.899,21.336 80.899,16.51 81.28,16.129 81.28,8.763 82.55,7.493 89.662,7.493 90.678,8.509 90.678,12.192 88.646,12.192 88.646,9.017 88.392,8.763 83.439,8.763 82.804,9.398 82.804,16.764 82.804,23.114 82.169,23.749 71.501,23.749 70.866,23.114 70.866,9.525 72.898,9.525
NetC2_1 on Bottom Layer "NETC2_1_L02_P015" (solid, pour order 15): 75.946,12.319 75.946,9.144 76.073,9.017 76.073,6.35 78.867,3.556 105.918,3.556 109.22,6.858 114.427,6.858 114.427,16.383 111.506,16.383 111.506,13.589 111.252,13.335 107.061,13.335 106.807,13.589 106.807,16.002 104.775,16.002 104.775,12.954 105.791,11.938 111.887,11.938 112.268,11.557 112.268,9.652 111.76,9.144 105.283,9.144 104.394,8.255 104.394,5.842 103.505,4.953 79.883,4.953 77.978,6.858 77.978,12.319
+18VAC on Bottom Layer "+18VAC_L02_P014" (solid, pour order 14): 93.472,39.878 109.022,39.878 110.49,38.324 110.49,24.384 105.029,24.384 104.521,24.892 104.521,26.416 104.775,26.67 107.823,26.67 107.823,35.56 107.315,36.068 93.472,36.068
-18VAC on Bottom Layer "-18VAC_L02_P013" (solid, pour order 13): 93.472,34.544 105.791,34.544 107.188,33.147 107.188,30.607 106.553,29.972 104.013,29.972 103.378,29.337 103.378,23.749 104.14,22.987 110.998,22.987 111.76,23.749 111.76,26.67 113.538,26.67 113.538,22.225 112.649,21.336 102.87,21.336 101.346,22.86 101.346,29.337 100.584,30.099 93.472,30.099
GND on Bottom Layer "GND_L02_P012" (solid, pour order 12): 19.431,25.4 18.923,24.892 18.923,16.764 19.431,16.256 30.988,16.256 31.877,17.145 31.877,23.876 33.147,25.146 33.147,28.956 35.179,28.956 35.179,24.13 33.782,22.733 33.782,17.145 34.671,16.256 51.308,16.256 59.563,8.001 72.771,8.001 73.406,8.636 73.406,20.574 74.549,20.574 74.676,20.447 74.676,16.129 75.438,15.367 75.438,6.604 74.041,5.207 58.039,5.207 48.895,14.351 18.034,14.351 16.637,15.748 16.637,25.781 19.431,25.781
NetD7_C on Bottom Layer "NETD7_C_L02_P011" (solid, pour order 11): 84.201,70.485 84.201,63.246 89.408,63.246 89.408,58.293 91.948,55.753 99.949,55.753 99.949,60.198 96.52,60.198 95.123,61.595 95.123,70.485
NetD9_C on Bottom Layer "NETD9_C_L02_P010" (solid, pour order 10): 72.263,70.485 81.788,70.485 81.788,60.706 92.456,50.038 100.076,50.038 100.076,45.212 89.916,45.212 77.343,57.785 77.343,63.881 72.263,63.881
NetC8_2 on Bottom Layer "NETC8_2_L02_P009" (solid, pour order 9): 61.214,27.305 58.928,25.019 53.213,25.019 53.213,22.987 65.659,22.987 65.659,27.305
NetC7_1 on Bottom Layer "NETC7_1_L02_P007" (solid, pour order 7): 55.118,67.056 55.118,65.024 55.626,64.516 65.786,64.516 65.786,67.056
D1 on Bottom Layer "D1_L02_P006" (solid, pour order 6): 20.574,68.707 20.574,63.5 22.606,61.468 37.084,61.468 38.481,62.865 52.705,62.865 55.372,60.198 57.912,60.198 61.468,56.642 69.596,56.642 69.596,51.308 75.819,51.308 75.819,60.579 61.976,60.579 59.309,63.246 55.499,63.246 53.721,65.024 37.719,65.024 37.719,68.707 35.687,68.707 35.687,65.024 34.417,63.754 23.876,63.754 22.606,65.024 22.606,68.707
GND on Bottom Layer "GND_L02_P004" (solid, pour order 4): 16.637,25.4 16.637,31.623 20.193,35.179 28.194,35.179 30.607,37.592 30.607,60.452 41.928,60.452 43.325,61.849 46.482,61.849 46.482,42.926 44.196,40.64 37.338,40.64 37.338,35.687 34.671,33.02 21.209,33.02 19.431,31.242 19.431,25.4
VBATT on Bottom Layer "VBATT_L02_P000" (solid, pour order 0): 48.133,61.849 51.943,61.849 53.086,60.706 53.086,52.578 55.753,49.911 75.819,49.911 75.819,40.64 50.419,40.64 48.133,42.926

## Silkscreen, mask and mechanical layers (free items; w line width, h text height)
Board Shape:
  the board outline again, w0.5

## Text inside footprints (layer, text, board x,y; h text height)
C1: Top Overlay "+" at 70.612,21.263 h1.2
C2: Top Overlay "+" at 108.404,6.755 h1.2 r90
C4: Top Overlay "+" at 86.487,21.136 h1.2
Q1: Top Overlay "S" at 23.898,70.54 h0.7; Top Overlay "D" at 21.134,70.557 h0.7; Top Overlay "G" at 18.593,70.54 h0.7
Q2: Top Overlay "S" at 39.011,70.667 h0.7; Top Overlay "D" at 36.247,70.684 h0.7; Top Overlay "G" at 33.706,70.667 h0.7
Q3: Top Overlay "G" at 23.952,23.948 h0.7 r180; Top Overlay "D" at 21.411,23.931 h0.7 r180; Top Overlay "S" at 18.647,23.948 h0.7 r180
Q4: Top Overlay "S" at 34.395,23.948 h0.7 r180; Top Overlay "D" at 37.159,23.931 h0.7 r180; Top Overlay "G" at 39.7,23.948 h0.7 r180